# Altium PCB PCB1.PcbDoc
Units mm, origin at the board's own origin, x right, y up, seen from the top; angles counter-clockwise.
Board outline 69.25 x 61.75 mm, 2 copper layers (Top Layer, Bottom Layer); 26 components, 20 nets, 98 pads, 2 vias.
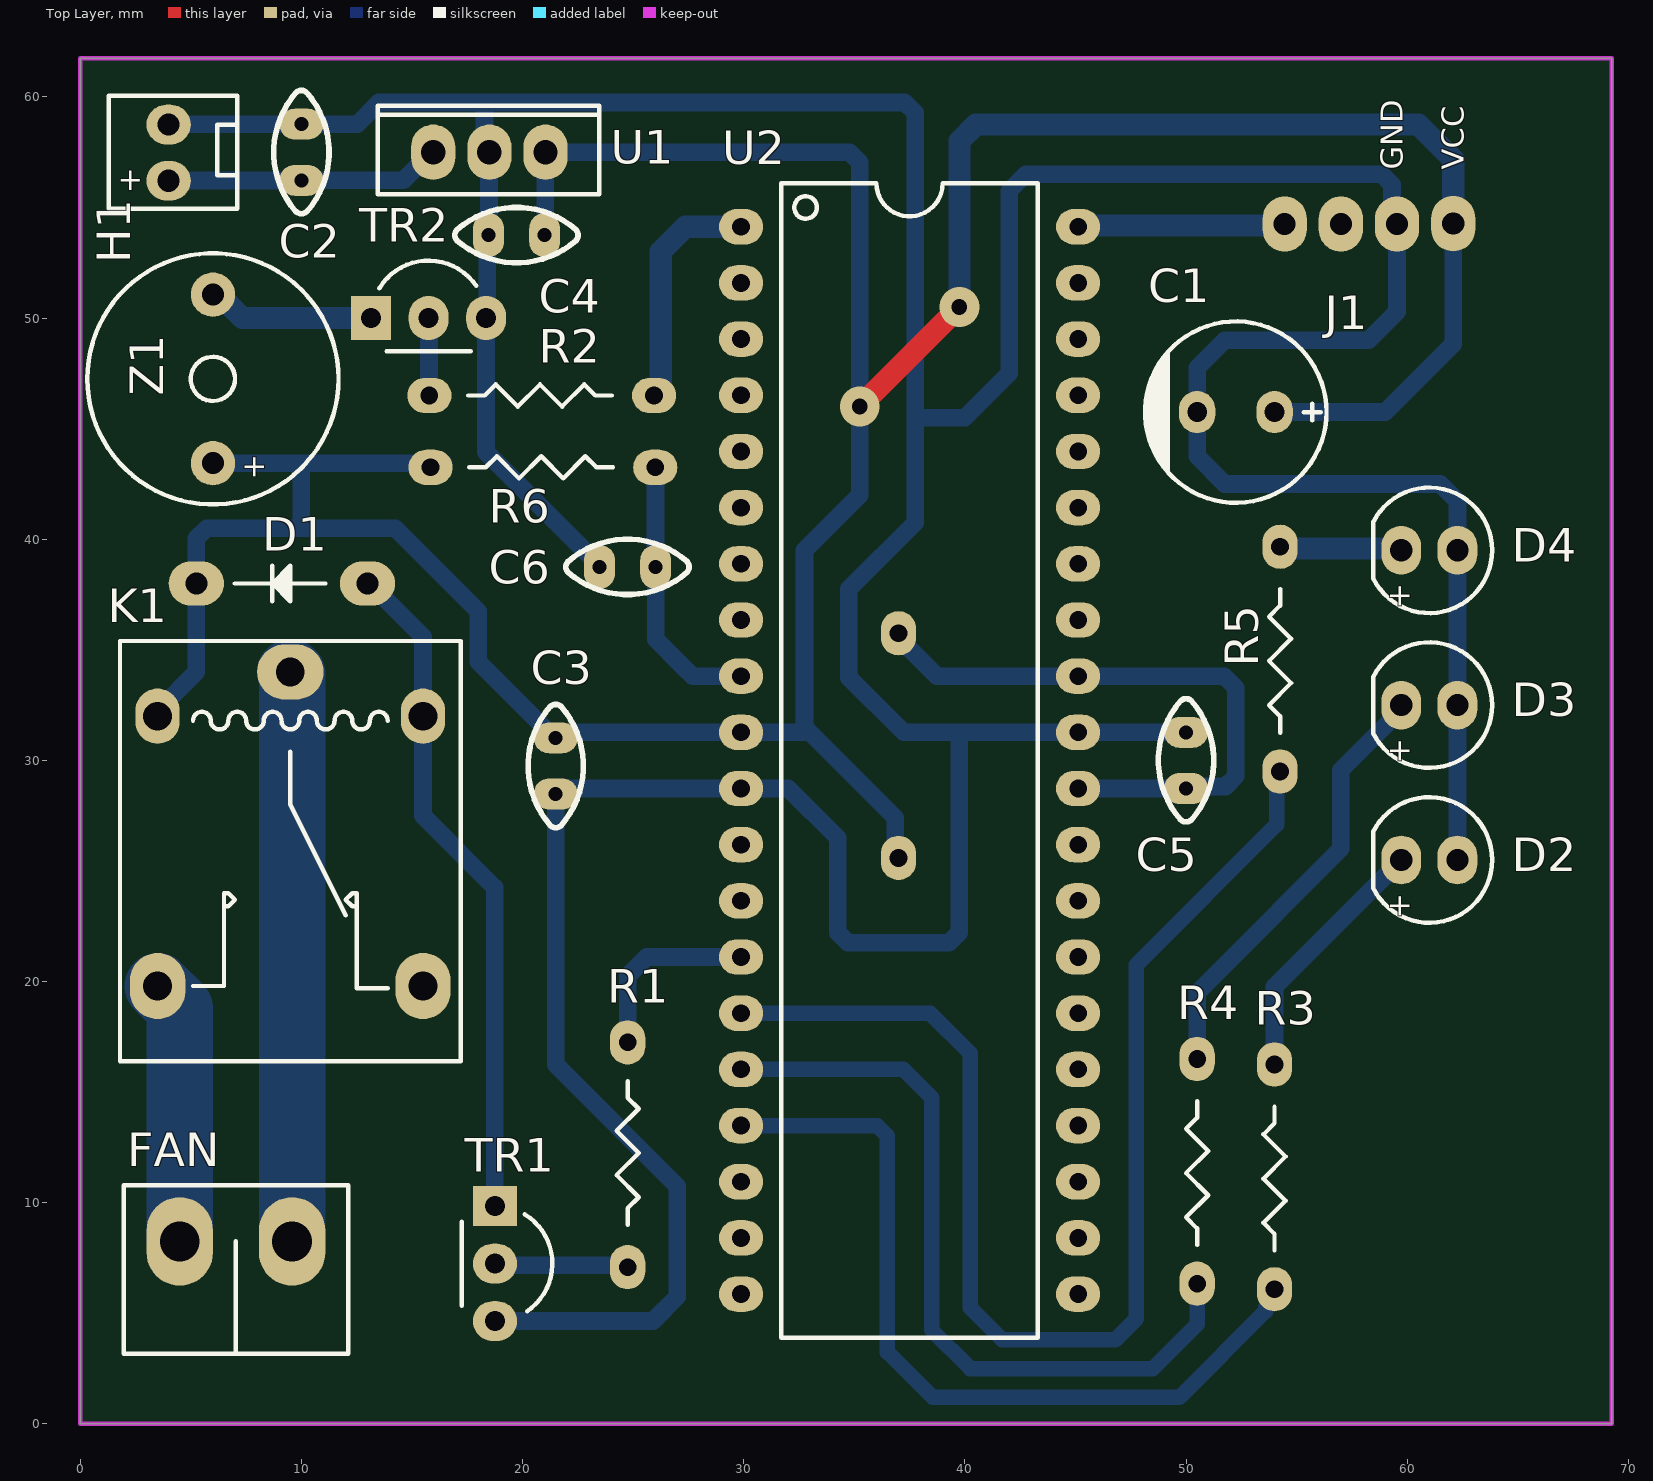
[diagram p0: Top Layer view]
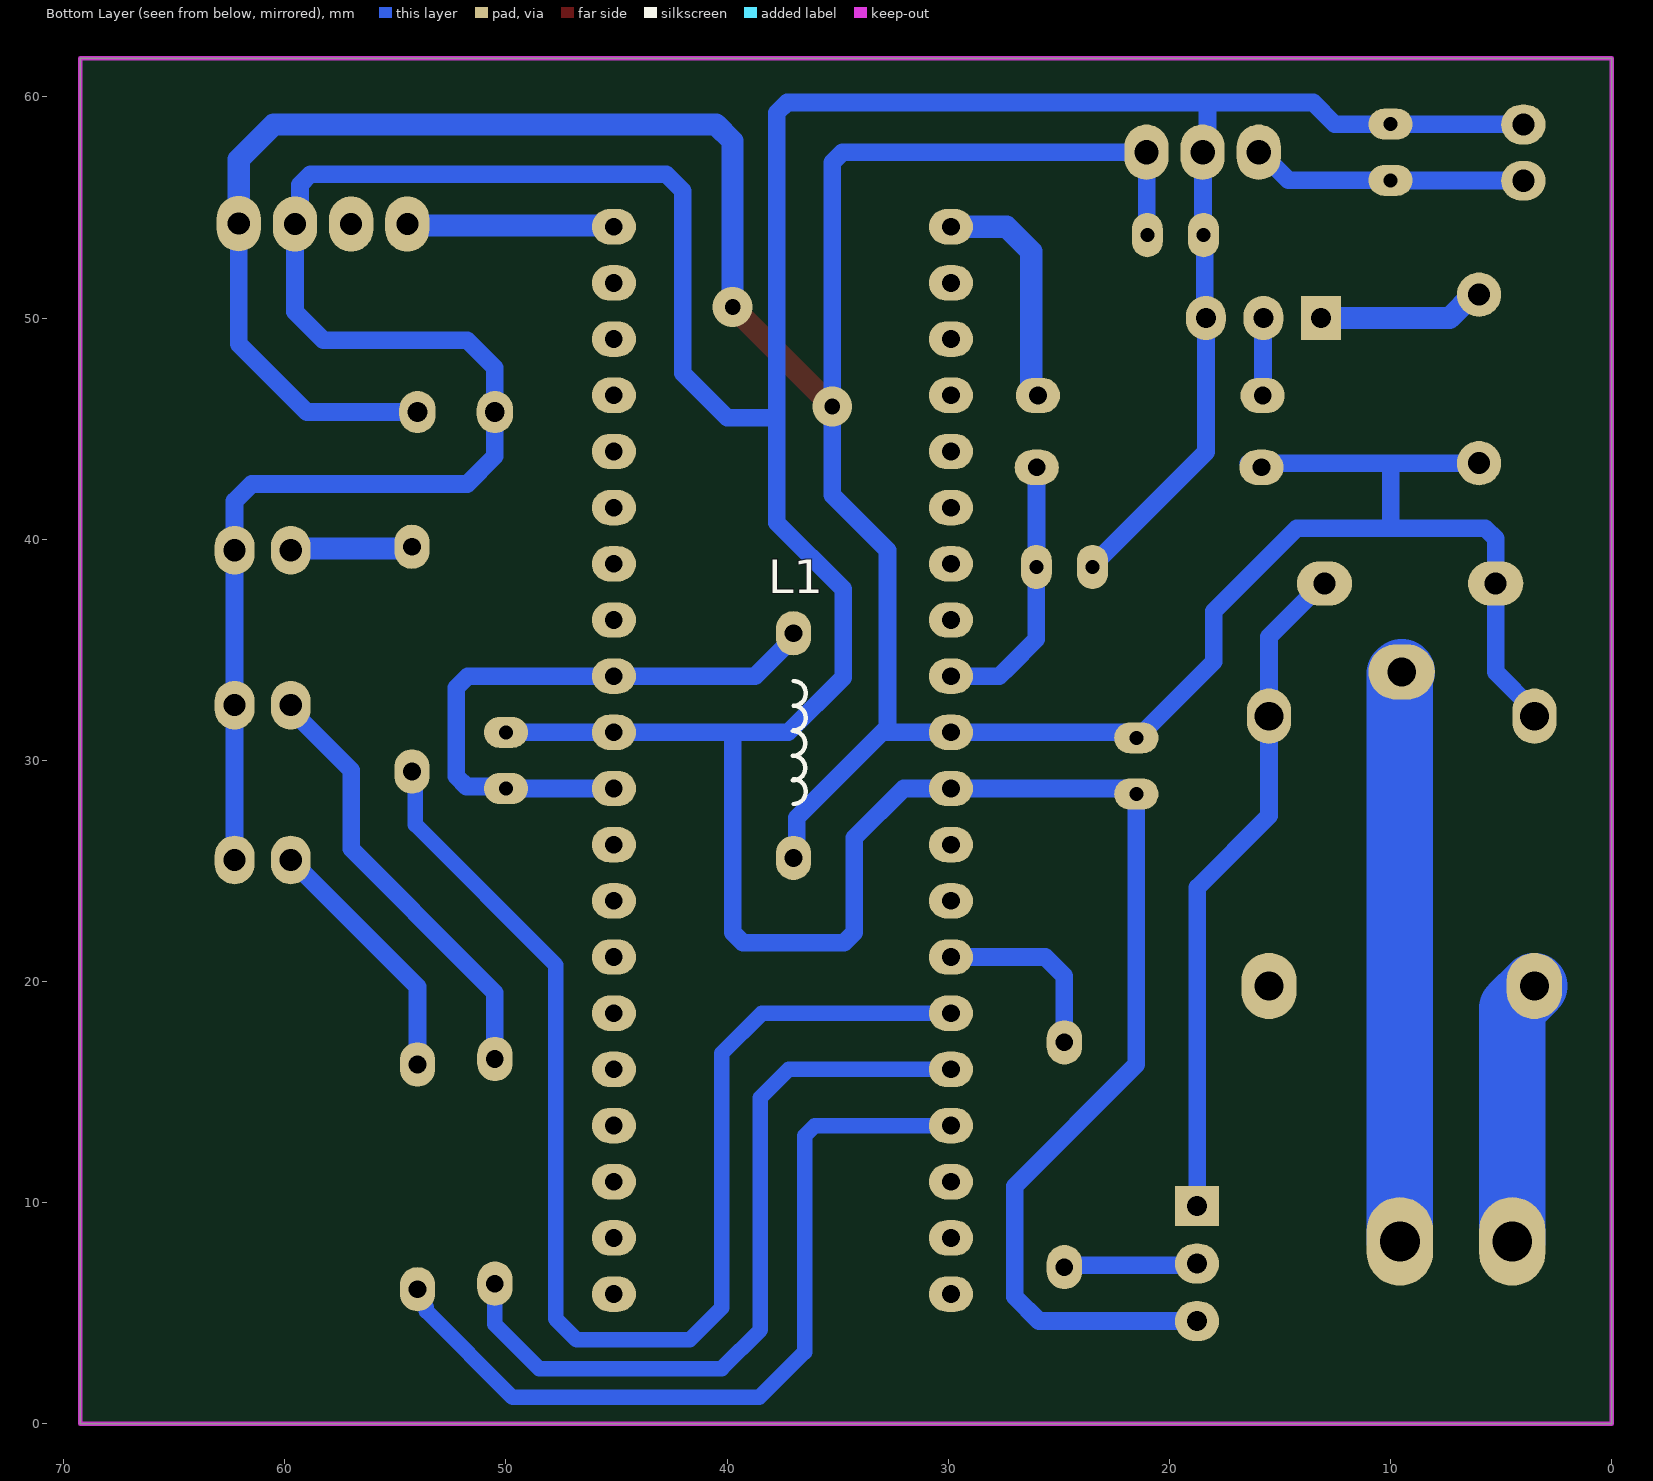
[diagram p1: Bottom Layer view, seen from below]
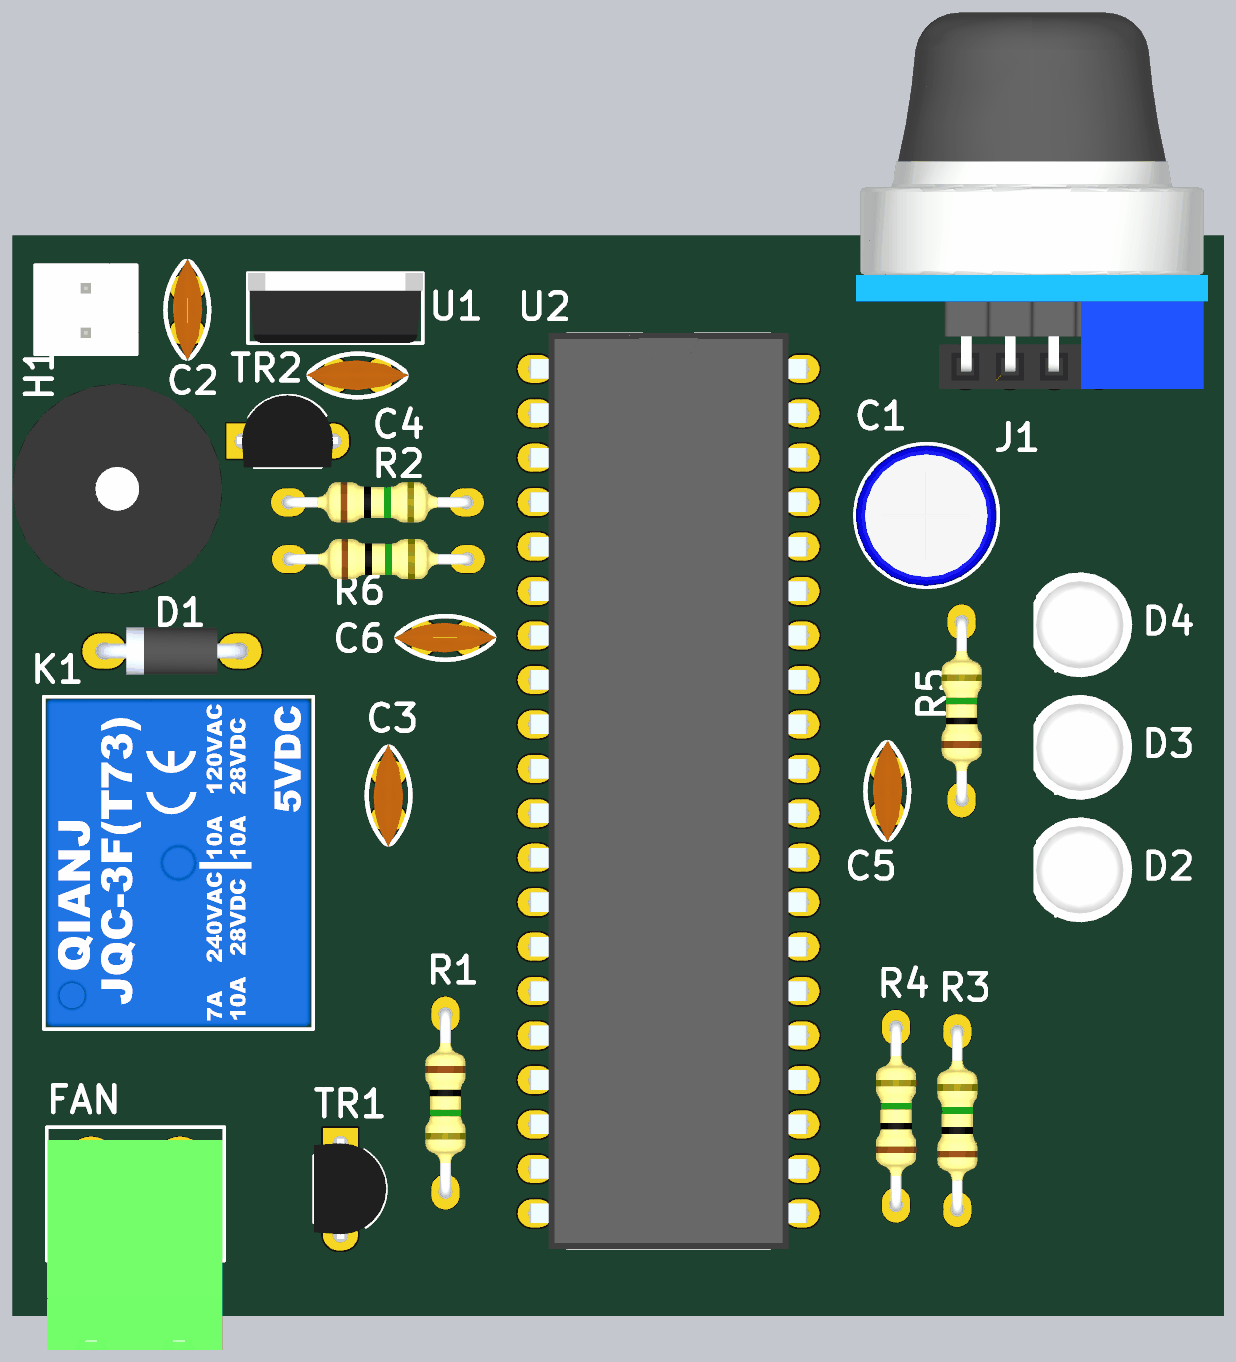
[diagram p2: 3D render of the assembled board from above, using the file's embedded part models]

## Layer stack, top to bottom
Top Solder: solder mask 0.0102, Solder Resist, Dk 3.5
Top Layer: signal copper 0.0356
Dielectric 1: dielectric 0.32, FR-4, Dk 4.8
Bottom Layer: signal copper 0.0356
Bottom Solder: solder mask 0.0102, Solder Resist, Dk 3.5

## Board outline
0,0 69.25,0 69.25,61.75 0,61.75

## Design rules (kind name [scope] priority, off if disabled: settings)
Clearance [All] p1: gap=0.5 ignorepadtopadclearanceinfootprint=FALSE
Height [All] p1: minheight=0 maxheight=40 prefheight=12.7
PolygonConnect [All] p1: connectstyle=Relief reliefconductorwidth=0.254 reliefentries=4 polygonreliefangle="90 Angle" airgapwidth=0.254
RoutingVias [All] p1: holewidth=0.7 width=2 viastyle="Through Hole" minholewidth=0.711 minwidth=1.27 maxholewidth=1 maxwidth=3
SolderMaskExpansion [All] p1: expansion=0.102 istentingtop=FALSE
Width [All] p1: maxlimit=10 minlimit=0.5 preferedwidth=1
29 further rules are at their usual default settings.

## Components (designator, comment, footprint, x,y, rotation, side; value= is the part's Value field where it differs from the comment)
C1 "100uF" "cap 03" 52.25,45.75 r0 top
C2 "100nF" "Cap - 100nF" 10,57.5 r90 top
C3 "100nF" "Cap - 100nF" 21.5,29.75 r270 top
C4 "100nF" "Cap - 100nF" 19.73,53.75 r180 top
C5 "100nF" "Cap - 100nF" 50,30 r90 top
C6 "100nF" "Cap - 100nF" 24.75,38.75 r180 top
D1 "1N5819" Diode_Axial_Lead 12.99,38 r180 top
D2 "Red" LED5MM 61,25.5 r180 top
D3 "Yello" LED5MM 61,32.5 r180 top
D4 "Green" LED5MM 61,39.5 r180 top
FAN "phoenix 2" phonix-2 4.5,8.25 r0 top
H1 "Header2" HEADER-2 4,58.75 r270 top
J1 "MQ" MQ 54.46,54.25 r90 top
K1 "JQC-3F 1C DC5V" JQC-3F(T73) 9.5,34 r0 top
L1 "100uH" IND-DIP 37,25.59 r90 bottom
R1 "330R" RES-DIP 24.75,17.25 r270 top
R2 "330R" RES-DIP 15.788,46.5 r0 top
R3 "330R" RES-DIP 54,6.09 r90 top
R4 "330R" RES-DIP 50.5,6.34 r90 top
R5 "330R" RES-DIP 54.25,29.5 r90 top
R6 "330R" RES-DIP 15.84,43.25 r0 top
TR1 "BC547B" TO-92 18.75,9.85 r0 top
TR2 "BC547B" TO-92 13.15,50 r90 top
U1 "7805" TO-220 15.96,57.5 r0 top
U2 "ATMEGA16A-PU" DIP-40 37.5,30 r0 top
Z1 "Buzzer" BUZZER-TMB12A05 6,47.25 r270 top

## Footprints (in the part's own frame and the unit in brackets; to place one, negate y for a bottom-side part, rotate by r counter-clockwise, add the part's x,y. Pads: shape width x height; smd on the part's side, far side on the other; paste and mask are expansions set on the pad)
BUZZER-TMB12A05 [mm]
  round 2 hole 1 paste+0 mask+0.04: 1(-3.81,0) 2(3.81,0)
  silkscreen extent -5.68,-5.68 5.68,5.68, body extent -6.02,-6 5.98,6, height 9.61
"cap 03" [mil]
  oval 65x75 hole 35: 1(68.9,0) 2(-68.9,0)
  silkscreen extent -161,-161 161,161, body extent -159,-159 157,158, height 473
"Cap - 100nF" [mm]
  oval 1.4x2 hole 0.635: 1(-1.27,0) 2(1.27,0)
  silkscreen extent -2.78,-1.25 2.79,1.25, body extent -2.92,-0.86 2.92,0.83, height 6.92
Diode_Axial_Lead [mm]
  oval 2.5x2 hole 1: A(0,0) K(7.74,0)
  silkscreen extent 1.9,-0.8 6,0.8, body extent -0.43,-1.35 8.17,1.35, height 2.85
DIP-40 [mm]
  oval 2x1.6 hole 0.8: 1(-7.62,24.13) 2(-7.62,21.59) 3(-7.62,19.05) 4(-7.62,16.51) 5(-7.62,13.97) 6(-7.62,11.43) 7(-7.62,8.89) 8(-7.62,6.35) 9(-7.62,3.81) 10(-7.62,1.27) 11(-7.62,-1.27) 12(-7.62,-3.81) 13(-7.62,-6.35) 14(-7.62,-8.89) 15(-7.62,-11.43) 16(-7.62,-13.97) 17(-7.62,-16.51) 18(-7.62,-19.05) 19(-7.62,-21.59) 20(-7.62,-24.13) 21(7.62,-24.13) 22(7.62,-21.59) 23(7.62,-19.05) 24(7.62,-16.51) 25(7.62,-13.97) 26(7.62,-11.43) 27(7.62,-8.89) 28(7.62,-6.35) 29(7.62,-3.81) 30(7.62,-1.27) 31(7.62,1.27) 32(7.62,3.81) 33(7.62,6.35) 34(7.62,8.89) 35(7.62,11.43) 36(7.62,13.97) 37(7.62,16.51) 38(7.62,19.05) 39(7.62,21.59) 40(7.62,24.13)
  silkscreen extent -5.8,-26.1 5.8,26.1, body extent -7.92,-26.16 7.92,26.16, height 5.83
HEADER-2 [mm]
  oval 1.8x2 hole 1 paste+0 mask+0.04: 1(0,0) 2(2.54,0)
  silkscreen extent -1.3,-2.7 3.8,3.1, body extent -1.2,-2.8 3.8,3.2, height 12.5
IND-DIP [mm]
  oval 2x1.6 hole 0.8 paste+0 mask+0.04: 1(0,0) 2(10.16,0)
  silkscreen extent 2.44,-0.56 8,0.03, body extent -0.3,-1.16 10.46,1.16, height 2.93
JQC-3F(T73) [mm]
  oval 3x2.5 hole 1.3 paste+0 mask+0.04: 1(0,0)
  oval 2.5x3 hole 1.3 paste+0 mask+0.04: 2(-6,-14.2) 3(6,-14.2)
  oval 2x2.5 hole 1.3 paste+0 mask+0.04: 4(-6,-2) 5(6,-2)
  silkscreen extent -7.7,-17.6 7.7,1.4, body extent -7.54,-17.45 7.54,1.25, height 14.94
LED5MM [mm]
  oval 1.8x2.2 hole 1 paste+0 mask+0.04: A(1.27,0) K(-1.27,0)
  silkscreen extent -2.84,-2.84 2.54,2.84, body extent -3,-3 2.5,3, height 28.8
MQ [mm]
  oval 2.5x2 hole 1: 1(0.021,-7.62) 2(0,-5.08) 3(0,-2.54) 4(0,0)
  body extent -1.27,-13.86 20.23,6.24, height 38
phonix-2 [mm]
  oval 3x4 hole 1.8 paste+0 mask+0.04: 1(0,0) 2(5.08,0)
  silkscreen extent -2.54,-5.08 7.62,2.54, body extent -2.5,-10.2 7.5,1.8, height 8.47
RES-DIP [mm]
  oval 2x1.6 hole 0.8 paste+0 mask+0.04: 1(0,0) 2(10.16,0)
  silkscreen extent 1.75,-0.5 8.25,0.5, body extent -0.3,-1.16 10.46,1.16, height 2.93
TO-92 [mm]
  rect 2x1.8 hole 0.9: 1(0,0)
  oval 2x1.8 hole 0.9: 2(0,-2.6) 3(0,-5.2)
  silkscreen extent -1.5,-4.75 2.6,-0.38, body extent -1.5,-5.45 2.62,0.3, height 10.67
TO-220 [mm]
  oval 2x2.5 hole 1.1: 1(0,0) 2(2.54,0) 3(5.08,0)
  silkscreen extent -2.5,-1.9 7.5,2.1, body extent -2.5,-1.9 7.5,2.11, height 21

## Part data
C1: library part Cap-Polar, "Polar Capacitor", Voltage=16V, Adding Date=1387/12/20, Designer="Saeid Jorablo", Organazation=ControTec
C2 C3 C4 C5 C6: library part Cap-Bipolar, "Bipolar Capacitor", Voltage=100V, Adding Date=1387/12/20, Designer="Saeid Jorablo", Organazation=ControTec
D1: "1N58 Series 600 mV 1 A 40 V Max Reverse Voltage Schottky Barrier Rectifier-DO-41", Average Rectified Current=1A, Capacitance=110pF, Case/Package=DO-41, Forward Voltage=900mV, Manufacturer="ON Semiconductor / Fairchild", Max Forward Surge Current (Ifsm)=25A, Max Operating Temperature=125°C, Max Repetitive Reverse Voltage (Vrrm)=40V, Max Reverse Current=500uA, Max Reverse Leakage Current=1mA, Min Operating Temperature=-65°C, Package Quantity=5000, Supplier Part Number 1=1N5819FSCT-ND, Category="Schottky Diodes", ComponentLink1Description=https://datasheet.ciiva.com/34302/1200637-34302074.pdf?src-supplier=Jameco, ComponentLink1URL=https://datasheet.ciiva.com/34302/1200637-34302074.pdf?src-supplier=Jameco, ComponentLink2Description=https://datasheet.ciiva.com/4719/1n5817-d-103200-4719059.pdf?src-supplier=Mouser, ComponentLink2URL=https://datasheet.ciiva.com/4719/1n5817-d-103200-4719059.pdf?src-supplier=Mouser, ComponentLink3Description=https://datasheet.ciiva.com/25951/1n5819-25951350.pdf?src-supplier=Avnet+Europe, ComponentLink3URL=https://datasheet.ciiva.com/25951/1n5819-25951350.pdf?src-supplier=Avnet+Europe, ComponentLink4Description=https://datasheet.ciiva.com/1177/1671052-1177084.pdf?src-supplier=Element14, ComponentLink4URL=https://datasheet.ciiva.com/1177/1671052-1177084.pdf?src-supplier=Element14, ComponentLink5Description=https://datasheet.ciiva.com/8300/1n5819-8300426.pdf?src-supplier=Avnet, ComponentLink5URL=https://datasheet.ciiva.com/8300/1n5819-8300426.pdf?src-supplier=Avnet, ComponentLink6Description=https://datasheet.ciiva.com/22651/1671052-22651942.pdf?src-supplier=Element14, ComponentLink6URL=https://datasheet.ciiva.com/22651/1671052-22651942.pdf?src-supplier=Element14, Contact Plating=Tin,Matte, Current Rating=1A, Diameter=2.72mm, Element Configuration=Single, Forward Current=1A, Height=2.72mm, Lead Free="Lead Free", Length=5.2mm, Manufacturer Part Number=1N5819, Max Reverse Voltage (DC)=40V, Max Surge Current=25A, Mount="Through Hole", Number of Pins=2, Output Current=1A, Packaging="Tape and Reel", Peak Non-Repetitive Surge Current=25A, Polarity=Standard, Radiation Hardening=No, REACH SVHC="No SVHC", RoHS=Yes, RoHS Compliant=Yes, Series=-, Supplier 1=Digi-Key, Voltage Rating (DC)=40V, Weight=0.245g, Width=2.72mm
D2 D3 D4: library part LED
FAN: library part CONN-PH-2
H1: library part HEADER-2
K1: "Relay Milon 5V 1Contact T73"
L1: library part Inductor
R1 R2 R3 R4 R5 R6: library part RES-Dip, "1/4 W DIP"
TR1 TR2: "ON SEMICONDUCTOR - BC547B - Bipolar (BJT) Single Transistor, General Purpose, NPN, 45 V, 300 MHz, 500 mW, 100 mA, 110 hFE", Case/Package=TO-92, Collector Base Voltage (VCBO)=50V, Collector Emitter Breakdown Voltage=45V, Collector Emitter Saturation Voltage=300mV, Current Rating=100mA, Emitter Base Voltage (VEBO)=6V, Frequency=300MHz, Manufacturer="ON Semiconductor / Fairchild", Max Operating Temperature=150°C, Max Power Dissipation=500mW, Min Operating Temperature=-65°C, Package Quantity=2000, Supplier Part Number 1=BC547BFS-ND, Voltage=40V, Category=BJTs, Collector Emitter Voltage (VCEO)=45V, ComponentLink1Description=https://datasheet.ciiva.com/17011/bc547-17011404.pdf?src-supplier=Future+Electronics, ComponentLink1URL=https://datasheet.ciiva.com/17011/bc547-17011404.pdf?src-supplier=Future+Electronics, ComponentLink2Description=https://datasheet.ciiva.com/985/bc546-547-548rev5-985523.pdf?src-supplier=Digi-Key, ComponentLink2URL=https://datasheet.ciiva.com/985/bc546-547-548rev5-985523.pdf?src-supplier=Digi-Key, ComponentLink3Description=https://datasheet.ciiva.com/972/bc546-972262.pdf?src-supplier=Digi-Key, ComponentLink3URL=https://datasheet.ciiva.com/972/bc546-972262.pdf?src-supplier=Digi-Key, ComponentLink4Description=https://datasheet.ciiva.com/1195/1868820-1195464.pdf?src-supplier=Element14, ComponentLink4URL=https://datasheet.ciiva.com/1195/1868820-1195464.pdf?src-supplier=Element14, ComponentLink5Description=https://datasheet.ciiva.com/25996/bc550-25996616.pdf?src-supplier=Avnet+Europe, ComponentLink5URL=https://datasheet.ciiva.com/25996/bc550-25996616.pdf?src-supplier=Avnet+Europe, ComponentLink6Description=https://datasheet.ciiva.com/11197/bc550-11197769.pdf?src-supplier=Avnet, ComponentLink6URL=https://datasheet.ciiva.com/11197/bc550-11197769.pdf?src-supplier=Avnet, ComponentLink7Description=https://datasheet.ciiva.com/16472/bc550-16472201.pdf?src-supplier=Avnet+Asia, ComponentLink7URL=https://datasheet.ciiva.com/16472/bc550-16472201.pdf?src-supplier=Avnet+Asia, Contact Plating=Copper,Tin,Silver, Element Configuration=Single, Gain Bandwidth Product=100MHz, Height=4.58mm, hFE Min=200, Lead Free="Lead Free", Length=4.58mm, Manufacturer Part Number=BC547B, Max Breakdown Voltage=45V, Max Collector Current=100mA, Max Frequency=300MHz, Mount="Through Hole", Number of Elements=1, Number of Pins=3, Packaging=Bulk, Polarity=NPN, Power Dissipation=500mW, Pricing 1="1=0/50000, 10=0/36900, 25=0/32280, 100=0/20890, 500=0/13832, 1000=0/10605, 2500=0/09222, 5000=0/08300 (USD)", Radiation Hardening=No, REACH SVHC="No SVHC", RoHS=Yes, Stock 1=3549, Supplier 1=Digi-Key, Transition Frequency=300MHz, Voltage Rating (DC)=45V, Weight=0.007055oz, Width=3.86mm
U2: "MCU 8-Bit ATmega AVR RISC 16KB Flash 3.3V/5V 40-Pin PDIP", Case/Package=PDIP, Frequency=16MHz, Manufacturer="Microchip / Atmel", Max Operating Temperature=85°C, Max Supply Voltage=5.5V, Min Operating Temperature=-40°C, Min Supply Voltage=2.7V, Package Quantity=10, Supplier Part Number 1=ATMEGA16A-PU-ND, Category=Microcontrollers, ComponentLink1Description=https://datasheet.ciiva.com/26860/getdatasheetpartid-464499-26860340.pdf?src-supplier=Verical, ComponentLink1URL=https://datasheet.ciiva.com/26860/getdatasheetpartid-464499-26860340.pdf?src-supplier=Verical, ComponentLink2Description=https://datasheet.ciiva.com/14633/0900766b80db4e44-14633395.pdf?src-supplier=Allied+Electronics, ComponentLink2URL=https://datasheet.ciiva.com/14633/0900766b80db4e44-14633395.pdf?src-supplier=Allied+Electronics, ComponentLink3Description=https://datasheet.ciiva.com/1157/466147-1157513.pdf?src-supplier=Element14, ComponentLink3URL=https://datasheet.ciiva.com/1157/466147-1157513.pdf?src-supplier=Element14, Contact Plating=Tin,Matte, Core Architecture=AVR, Data Bus Width=8b, Height=4.445mm, Interface=I2C,SPI,UART,USART,2-Wire, Lead Free="Lead Free", Length=52.58mm, Manufacturer Part Number=ATMEGA16A-PU, Max Frequency=16MHz, Memory Size=16KB, Memory Type=FLASH, Mount="Through Hole", Number of ADC Channels=8, Number of I2C Channels=1, Number of I/Os=32, Number of Pins=40, Number of Programmable I/O=32, Number of PWM Channels=4, Number of SPI Channels=1, Number of Timers/Counters=3, Oscillator Type=Internal, Packaging=Rail/Tube, Peripherals="Brown-out Detect/Reset,POR,PWM,WDT", Pricing 1="1=3/96000, 25=3/63400, 100=3/28900 (USD)", Radiation Hardening=No, RAM Size=1KB, REACH SVHC="No SVHC", RoHS=Yes, Series="AVR® ATmega", Stock 1=31, Supplier 1=Digi-Key, Watchdog Timer=Yes, Width=13.97mm
Z1: library part BUZZER

## Via types
v1: diameter 1.8, hole 0.711, Top Layer to Bottom Layer, 2 vias

## Nets (pads, with @x,y where several pads share a name; then routed paths per layer and width w, separated by ;. In a path a pad name is that pad's centre, name@x,y a point inside that pad or via, vN(x,y) a via of type N, cw(c..) or ccw(c..) an arc to the next point about the centre after c; other vN are vias at no path point)
GND: C1.2 C2.2 C3.2 C4.2 C5.2 C6.2 D2.K D3.K D4.K H1.1 J1.2 TR1.3 TR2.3 U1.2 U2.11 U2.31 | length 247.4
  Bottom Layer w0.8: H1.1 4.01,58.76 9.99,58.76 C2.2 12.52,58.77 13.5,59.75 18.281,59.75 ; TR1.3 25.9,4.65 27,5.75 27,10.75 21.5,16.25 C3.2 21.691,28.48 21.941,28.73 U2.11 32.02,28.73 34.25,26.5 34.25,22.219 34.719,21.75 39.281,21.75 39.75,22.219 39.75,31.02 39.5,31.27 ; C6.2 23.48,38.814 18.35,43.944 TR2.3 18.405,50.055 18.405,53.695 C4.2 18.48,53.77 18.48,57.48 U1.2 18.281,57.719 18.281,59.75 ; C5.2 U2.31 39.5,31.27 ; D2.K D3.K D4.K 62.27,41.73 61.5,42.5 51.75,42.5 50.5,43.75 50.5,47.75 51.75,49 58.25,49 59.54,50.29 J1.2 59.31,54.48 59.31,56.031 58.842,56.5 42.75,56.5 42,55.75 42,47.5 40,45.5 37.75,45.5 ; 18.281,59.75 37.281,59.75 37.75,59.281 37.75,45.5 ; 37.75,45.5 37.75,40.75 34.75,37.75 34.75,33.75 37.23,31.27 39.5,31.27
NetC2_1: C2.1 H1.2 U1.1 | length 12.5
  Bottom Layer w0.8: H1.2 4.01,56.22 9.99,56.22 C2.1 14.615,56.23 15.885,57.5 U1.1
NetC5_1: C5.1 L1.2 U2.30 U2.32 | length 27.7
  Bottom Layer w0.8: L1.2 37,35.55 38.74,33.81 U2.32 51.721,33.81 52.25,33.281 52.25,29.289 51.781,28.82 50.09,28.82 C5.1 U2.30
NetC6_1: C6.1 R6.2 U2.9 | length 12.5
  Bottom Layer w0.8: R6.2 26.01,43.24 26.01,38.76 C6.1 26.02,35.48 27.25,34.25 27.69,33.81 U2.9 U2.9@29.785,33.905
NetD1_A: D1.A K1.5 TR1.1 | length 30.6
  Bottom Layer w0.8: D1.A 13.09,38 15.5,35.59 K1.5 15.5,27.5 18.75,24.25 TR1.1
NetD2_A: D2.A R3.2 | length 11.6
  Bottom Layer w0.8: R3.2 54,19.77 D2.A
NetD3_A: D3.A R4.2 | length 19.8
  Bottom Layer w0.8: R4.2 50.5,19.5 51.314,20.314 57,26 57,29.56 59.73,32.29 D3.A
NetD4_A: D4.A R5.2 | length 5.5
  Bottom Layer w1: R5.2 54.33,39.58 59.65,39.58 D4.A
NetFAN_1: FAN.1 K1.2 | length 12
  Bottom Layer w3: K1.2 4.5,18.8 FAN.1
NetFAN_2: FAN.2 K1.1 | length 25.8
  Bottom Layer w3: K1.1 9.58,33.92 FAN.2
NetJ1_4: J1.4 U2.40 | length 9.4
  Bottom Layer w1: U2.40 45.18,54.19 54.4,54.19 J1.4
NetR1_1: R1.1 U2.14 | length 8.5
  Bottom Layer w0.8: R1.1 24.75,20.25 25.61,21.11 U2.14
NetR1_2: R1.2 TR1.2 | length 6.1
  Bottom Layer w0.8: TR1.2 18.83,7.17 24.67,7.17 R1.2
NetR2_1: R2.1 TR2.2 | length 3.6
  Bottom Layer w0.8: TR2.2 15.769,49.981 15.769,46.519 R2.1
  Bottom Layer w1: R2.1 R2.1@15.825,46.5
NetR2_2: R2.2 U2.1 | length 10.7
  Bottom Layer w1: R2.2 25.973,46.5 26.25,46.777 26.25,53.016 27.364,54.13 U2.1
NetR3_1: R3.1 U2.17 | length 37.3
  Bottom Layer w0.7: U2.17 36.031,13.49 36.5,13.021 36.5,3.25 38.55,1.2 49.7,1.2 53.6,5.1 53.6,5.274 54,5.674 R3.1
NetR4_1: R4.1 U2.16 | length 35
  Bottom Layer w0.7: U2.16 37.22,16.03 38.5,14.75 38.5,4.25 40.25,2.5 48.5,2.5 50.5,4.5 R4.1
NetR5_1: R5.1 U2.15 | length 58.6
  Bottom Layer w0.7: U2.15 38.43,18.57 40.25,16.75 40.25,5.25 41.7,3.8 46.8,3.8 47.75,4.75 47.75,20.75 54.097,27.097 54.097,29.347 R5.1
NetTR2_1: TR2.1 Z1.1 | length 7.6
  Bottom Layer w1: Z1.1 6.271,51.06 7.331,50 TR2.1
VCC: C1.1 C3.1 C4.1 D1.K J1.1 K1.4 L1.1 R6.1 U1.3 U2.10 Z1.2 | length 162.7
  Top Layer w1: v1(35.25,46) v1(39.75,50.5)
  Bottom Layer w0.8: K1.4 3.5,32.25 5.25,34 D1.K 5.25,40.031 5.719,40.5 10,40.5 ; Z1.2 10,43.44 ; R6.1@16.44,43.44 10,43.44 ; C4.1 21.02,53.77 21.02,57.48 U1.3 34.781,57.5 35.25,57.031 v1@35.25,46.25 ; v1(35.25,46) 35.25,42 32.75,39.5 32.75,31.5 32.98,31.27 ; L1.1 37,25.79 36.847,25.943 36.847,27.403 32.98,31.27 ; C1.1 59,45.75 62.08,48.83 J1.1 ; 10,40.5 14.25,40.5 18,36.75 18,34.457 21.437,31.02 C3.1 21.691,31.02 21.941,31.27 U2.10 32.98,31.27 ; 10,40.5 10,43.44
  Bottom Layer w1: v1(35.25,46) v1@35.25,46.25 ; v1(39.75,50.5) 39.75,58 40.5,58.75 60.5,58.75 62.08,57.17 J1.1
pads on no net: J1.3 K1.3 U2.2 U2.3 U2.4 U2.5 U2.6 U2.7 U2.8 U2.12 U2.13 U2.18 U2.19 U2.20 U2.21 U2.22 U2.23 U2.24 U2.25 U2.26 U2.27 U2.28 U2.29 U2.33 U2.34 U2.35 U2.36 U2.37 U2.38 U2.39

## Keep-outs
Keep-Out Layer:
  the board outline again, w0.2

## Silkscreen, mask and mechanical layers (free items; w line width, h text height)
Top Overlay:
  text "GND" at 59.8,56.7 h1 r90
  text "VCC" at 62.55,56.7 h1 r90
  text "+" at 1.7,55.783 h1

## Text inside footprints (layer, text, board x,y; h text height)
D2: Top Overlay "+" at 59.233,24 h1 r270
D3: Top Overlay "+" at 59.233,31 h1 r270
D4: Top Overlay "+" at 59.233,38 h1 r270
Z1: Top Overlay "+" at 7.433,43.85 h1 r270